# Altium PCB IC_555_TIMER.PcbDoc
Units mm, origin at the board's own origin, x right, y up, seen from the top; angles counter-clockwise.
Board outline 44.58 x 33.02 mm, 2 copper layers (Top Layer, Bottom Layer); 7 components, 6 nets, 24 pads, 0 vias.
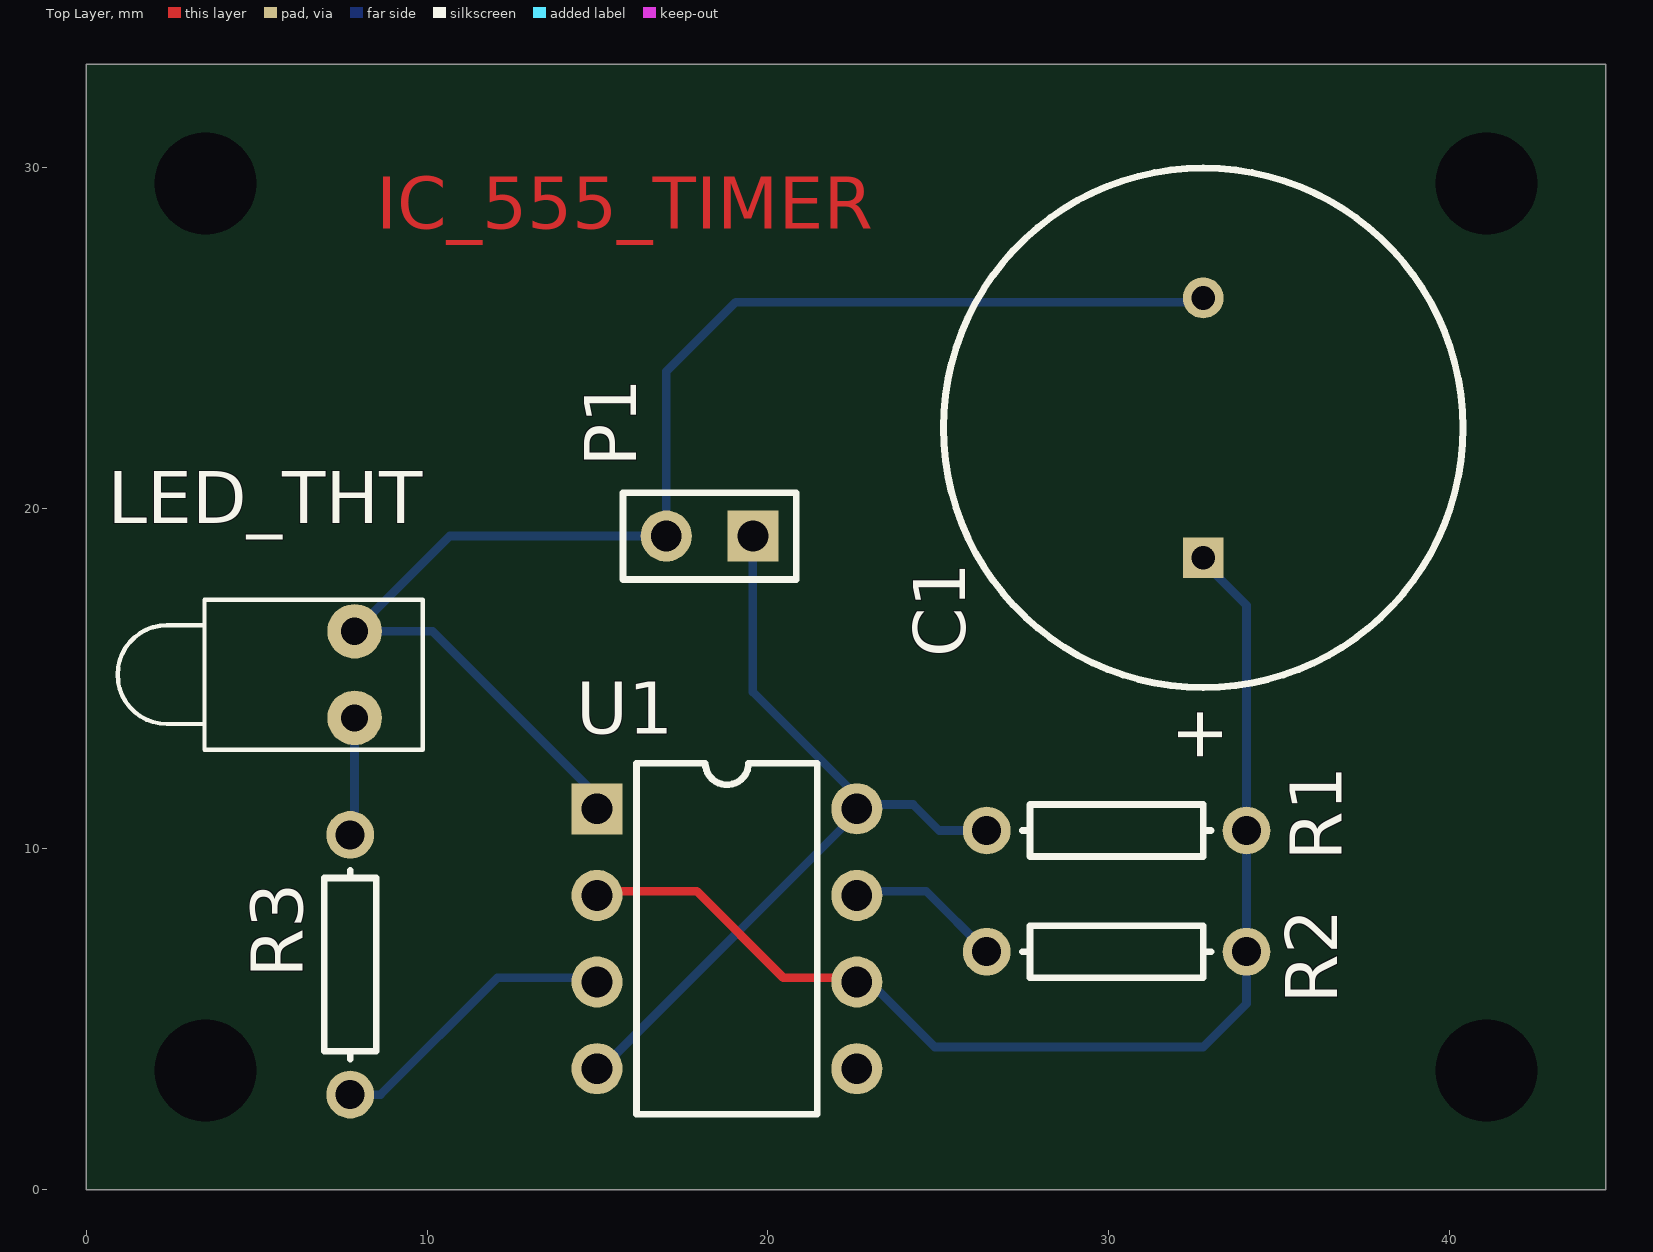
[diagram p0: Top Layer view]
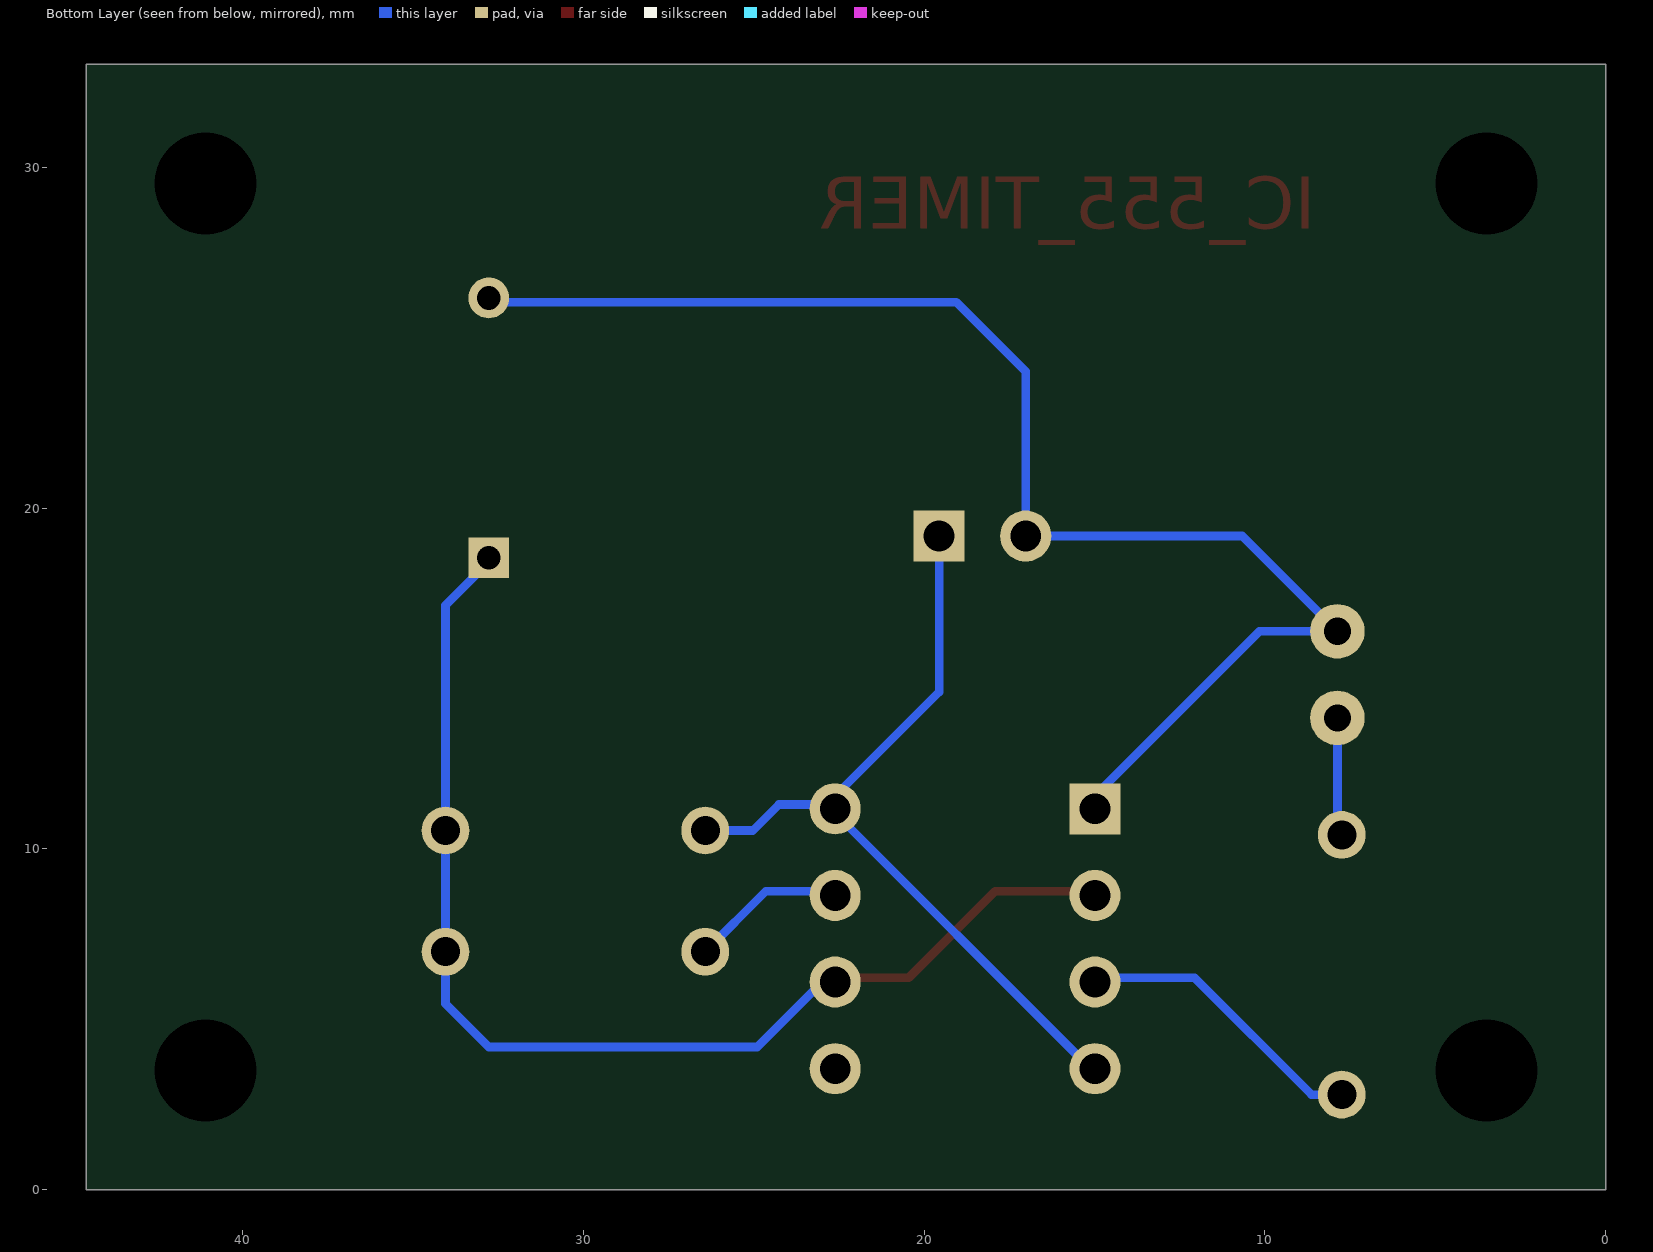
[diagram p1: Bottom Layer view, seen from below]

## Layer stack, top to bottom
Top Layer: signal copper 0.0356
Dielectric: dielectric 0.32, FR-4, Dk 4.8
Bottom Layer: signal copper 0.0356

## Board outline
0,0 44.577,0 44.577,33.02 0,33.02

## Design rules (kind name [scope] priority, off if disabled: settings)
Clearance [All] p1: gap=0.254
PolygonConnect [All] p1: connectstyle=Relief reliefconductorwidth=0.254 reliefentries=4 polygonreliefangle="90 Angle"
RoutingVias [All] p1: holewidth=0.711 width=1.27 viastyle="Through Hole" minholewidth=0.711 minwidth=1.27 maxholewidth=0.711 maxwidth=1.27
SilkscreenOverComponentPads [All] p1: minsilkscreentomaskgap=0.254
SolderMaskExpansion [All] p1: expansion=0.102
Width [All] p1: maxlimit=0.254 minlimit=0.254 preferedwidth=0.254
27 further rules are at their usual default settings.

## Components (designator, comment, footprint, x,y, rotation, side; value= is the part's Value field where it differs from the comment)
C1 "Cap Pol1" RB7.6-15 32.766,22.352 r270 top
LED_THT "LED1" LED-1 7.874,15.113 r180 top
P1 "Header 2" HDR1X2 19.558,19.177 r180 top
R1 "G" AXIAL-0.3 30.226,10.541 r180 top
R2 "Res1" AXIAL-0.3 30.226,6.985 r180 top
R3 "RESISTOR_THT" AXIAL-0.3 7.747,6.604 r90 top
U1 "NE555JG" JG008 18.796,7.366 r270 top

## Footprints (in the part's own frame and the unit in brackets; to place one, negate y for a bottom-side part, rotate by r counter-clockwise, add the part's x,y. Pads: shape width x height; smd on the part's side, far side on the other; paste and mask are expansions set on the pad)
AXIAL-0.3 [mm] "Axial Device, Thru-Hole; 2 Leads; 0.3 in Pin Spacing"
  round 1.4 hole 0.85: 1(-3.81,0) 2(3.81,0)
  silkscreen extent -2.77,-0.76 2.77,0.76
HDR1X2 [mm] "Connector; Header; 2 Position"
  rect 1.5x1.5 hole 0.9: 1(0,0)
  round 1.5 hole 0.9: 2(2.54,0)
  silkscreen extent -1.27,-1.27 3.81,1.27
JG008 [mm] "DIP; 8 Leads; Row Spacing 7.62 mm; Pitch 2.54 mm"
  rect 1.5x1.5 hole 0.9: 1(-3.81,-3.81)
  round 1.5 hole 0.9: 2(-1.27,-3.81) 3(1.27,-3.81) 4(3.81,-3.81) 5(3.81,3.81) 6(1.27,3.81) 7(-1.27,3.81) 8(-3.81,3.81)
  silkscreen extent -5.15,-2.65 5.15,2.65
LED-1 [mm] "Typical RED GaAs LED; 2 Leads"
  round 1.6 hole 0.8: 1(0,1.27) 2(0,-1.27)
  silkscreen extent -2,-2.2 6.95,2.2
RB7.6-15 [mm] "Polarized Capacitor (Radial); 2 Leads"
  rect 1.2x1.2 hole 0.7: 1(3.81,0)
  round 1.2 hole 0.7: 2(-3.81,0)
  silkscreen extent -7.62,-7.62 7.62,7.62

## Part data
C1: "Polarized Capacitor (Radial)"
LED_THT: "Typical RED GaAs LED"
P1: "Header, 2-Pin"
R1 R3: library part Res1, "Resistor"
R2: "Resistor"
U1: "Precision Timer"

## Free pads (board coordinates)
  round 1.524 hole 3: 0(3.5,3.5) 0(3.5,29.52) 0(41.077,3.5) 0(41.077,29.52)

## Nets (pads, with @x,y where several pads share a name; then routed paths per layer and width w, separated by ;. In a path a pad name is that pad's centre, name@x,y a point inside that pad or via, vN(x,y) a via of type N, cw(c..) or ccw(c..) an arc to the next point about the centre after c; other vN are vias at no path point)
+12V: P1.1 R1.2 U1.4 U1.8 | length 23.9
  Bottom Layer w0.254: U1.4@15.24,3.683 U1.8@22.86,11.303 ; P1.1 19.558,14.605 U1.8@22.86,11.303 ; R1.2 25.019,10.541 24.257,11.303 U1.8@22.86,11.303
GND: C1.2 LED_THT.2 P1.2 U1.1 | length 41.2
  Bottom Layer w0.254: U1.1@15.24,11.303 10.16,16.383 LED_THT.2 10.668,19.177 P1.2 17.018,24.003 19.05,26.035 C1.2@32.766,26.035
NetC1_1: C1.1 R1.1 R2.1 U1.2 U1.6 | length 34.8
  Top Layer w0.254: U1.2@15.24,8.763 17.907,8.763 20.447,6.223 U1.6@22.86,6.223
  Bottom Layer w0.254: U1.6@22.86,6.096 22.86,6.223 24.892,4.191 32.766,4.191 34.036,5.461 R2.1 R1.1 34.036,17.145 C1.1@32.766,18.415
NetLED_THT_1: LED_THT.1 R3.2 | length 3.5
  Bottom Layer w0.254: R3.2 7.874,10.541 LED_THT.1
NetR2_2: R2.2 U1.7 | length 4.3
  Bottom Layer w0.254: U1.7@22.86,8.763 24.638,8.763 R2.2
NetR3_1: R3.1 U1.3 | length 8.9
  Bottom Layer w0.254: R3.1 8.636,2.794 12.065,6.223 U1.3@15.24,6.223
pads on no net: U1.5

## Other copper
Top Layer:
  text "IC_555_TIMER" at 8.509,28.194 h1.52

## Silkscreen, mask and mechanical layers (free items; w line width, h text height)
Mechanical 1:
  the board outline again, w0.254

## Text inside footprints (layer, text, board x,y; h text height)
C1: Top Overlay "+" at 32.029,14.22 h1.5 r270